# Altium PCB PCB1.PcbDoc
Units mm, origin at the board's own origin, x right, y up, seen from the top; angles counter-clockwise.
Board outline 100 x 15 mm, 2 copper layers (Top Layer, Bottom Layer); 3 components, 3 nets, 6 pads, 0 vias.
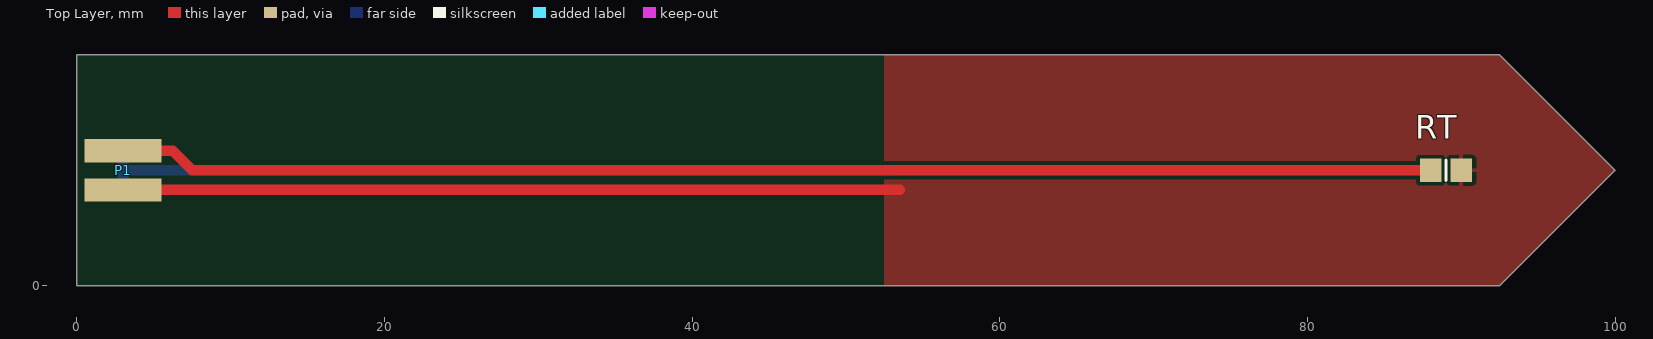
[diagram p0: Top Layer view]
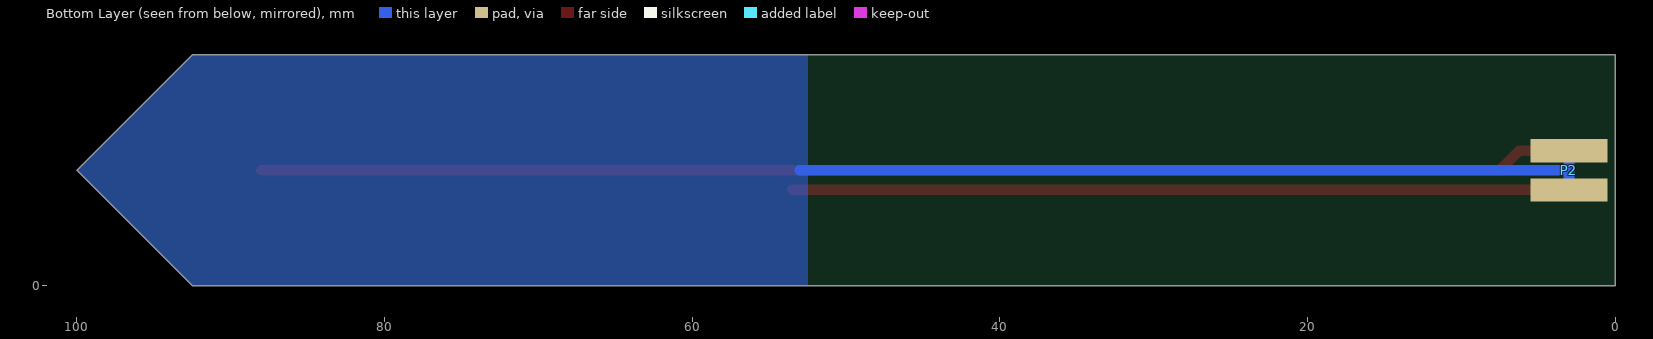
[diagram p1: Bottom Layer view, seen from below]

## Layer stack, top to bottom
Top Solder: solder mask 0.0102, Solder Resist, Dk 3.5
Top Layer: signal copper 0.0356
Dielectric 1: dielectric 0.32, FR-4, Dk 4.8
Bottom Layer: signal copper 0.0356
Bottom Solder: solder mask 0.0102, Solder Resist, Dk 3.5

## Board outline
0,0 92.5,0 100,7.5 92.5,15 0,15

## Design rules (kind name [scope] priority, off if disabled: settings)
Clearance [All] p1: gap=0.254 ignorepadtopadclearanceinfootprint=FALSE except(0: Arc-Hole Track-Hole SMDPad-Hole THPad-Hole Via-Hole Fill-Hole Poly-Hole Region-Hole Text-Hole)
PolygonConnect [All] p1: connectstyle=Relief reliefconductorwidth=0.254 reliefentries=4 polygonreliefangle="90 Angle" airgapwidth=0.254
RoutingVias [All] p1: holewidth=0.711 width=1.27 viastyle="Through Hole" minholewidth=0.711 minwidth=1.27 maxholewidth=0.711 maxwidth=1.27
SolderMaskExpansion [All] p1: expansion=0.102
Width [All] p1: maxlimit=1 minlimit=0.254 preferedwidth=0.254
30 further rules are at their usual default settings.

## Components (designator, comment, footprint, x,y, rotation, side; value= is the part's Value field where it differs from the comment)
P1 "Top" header2 3,6.23 r90 top
P2 "Bottom" header2 3,6.23 r90 bottom
RT "Res Thermal" 6-0805_M 89,7.5 r180 top

## Footprints (in the part's own frame and the unit in brackets; to place one, negate y for a bottom-side part, rotate by r counter-clockwise, add the part's x,y. Pads: shape width x height; smd on the part's side, far side on the other; paste and mask are expansions set on the pad)
6-0805_M [mm] "Chip Resistor, Body 2.0x1.2mm, IPC Low Density"
  rect 1.4x1.5 smd: 1(-1,0) 2(1,0)
  silkscreen extent 0,-0.65 0,0.65, body extent -1.07,-0.7 1.07,0.7, height 0.7
header2 [mm] "pitch 2.54 smd"
  rect 1.5x5 smd: 1(0,0) 2(2.54,0)

## Part data
P1 P2: library part "Header 2", "Header, 2-Pin", LatestRevisionDate=17-Jul-2002, LatestRevisionNote="Re-released for DXP Platform.", Publisher="Altium Limited"
RT: "Thermistor", Code_IPC=RESC2012, LatestRevisionDate=29-May-2009, LatestRevisionNote="IPC-7351 Footprint Added.", PackageDescription="Chip Resistor 0805 Case Size", PackageReference=6-0805, PackageVersion=Mar-2003, Published=24-Mar-1999, Publisher="Altium Limited"

## Nets (pads, with @x,y where several pads share a name; then routed paths per layer and width w, separated by ;. In a path a pad name is that pad's centre, name@x,y a point inside that pad or via, vN(x,y) a via of type N, cw(c..) or ccw(c..) an arc to the next point about the centre after c; other vN are vias at no path point)
gnd_probe: P1.1 RT.1 | length 50.5
  Top Layer w0.7: P1.1 53.5,6.23
sign_probe: P2.1 P2.2 | length 52.5
  Bottom Layer w0.7: P2.1 3,7.5 ; P2.2 3,7.5 ; 53,7.5 3,7.5
temp: P1.2 RT.2 | length 85.5
  Top Layer w0.7: P1.2 6.23,8.77 7.5,7.5 RT.2

## Polygon pours and split planes (outlines as drawn)
sign_probe on Bottom Layer "Bottom Layer-No Net" (solid, pour order 4): 52.5,15 92.5,15 100,7.5 92.5,0 52.5,0
gnd_probe on Top Layer "gnd_probe" (solid, pour order 2): 100,7.5 92.5,15 52.5,15 52.5,0 92.5,0

## Silkscreen, mask and mechanical layers (free items; w line width, h text height)
Mechanical 29:
  the board outline again, w0.254